# Altium PCB EM2_PCB.PcbDoc
Units mm, origin at the board's own origin, x right, y up, seen from the top; angles counter-clockwise.
Board outline 42 x 40 mm, 4 copper layers (Top Layer, Layer 1, Layer 2, Bottom Layer), stack 0.568 mm thick; 81 components, 71 nets, 313 pads, 15 vias.
Unrouted connection lines stored in the file: 167.
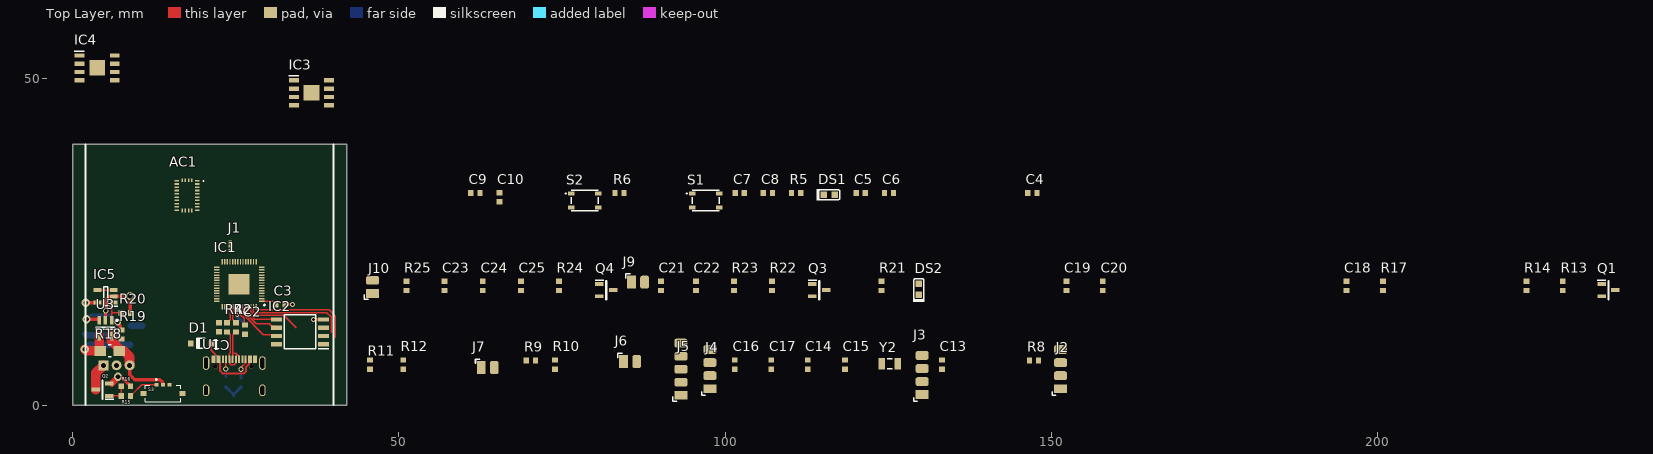
[diagram p0: Top Layer view]
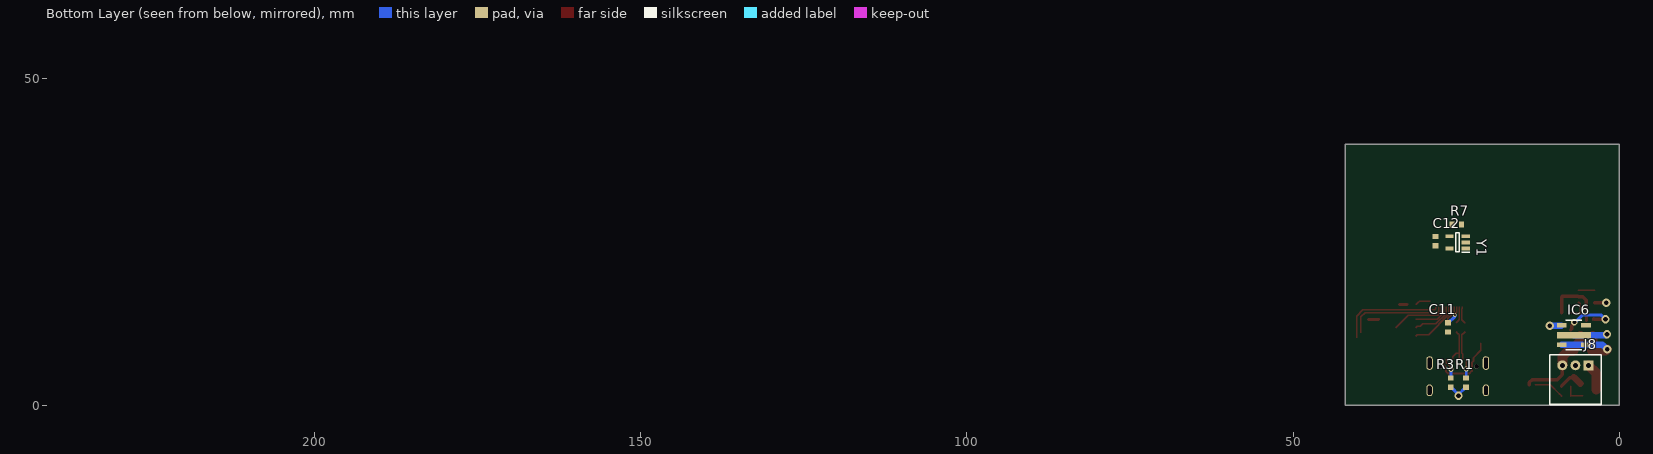
[diagram p1: Bottom Layer view, seen from below]
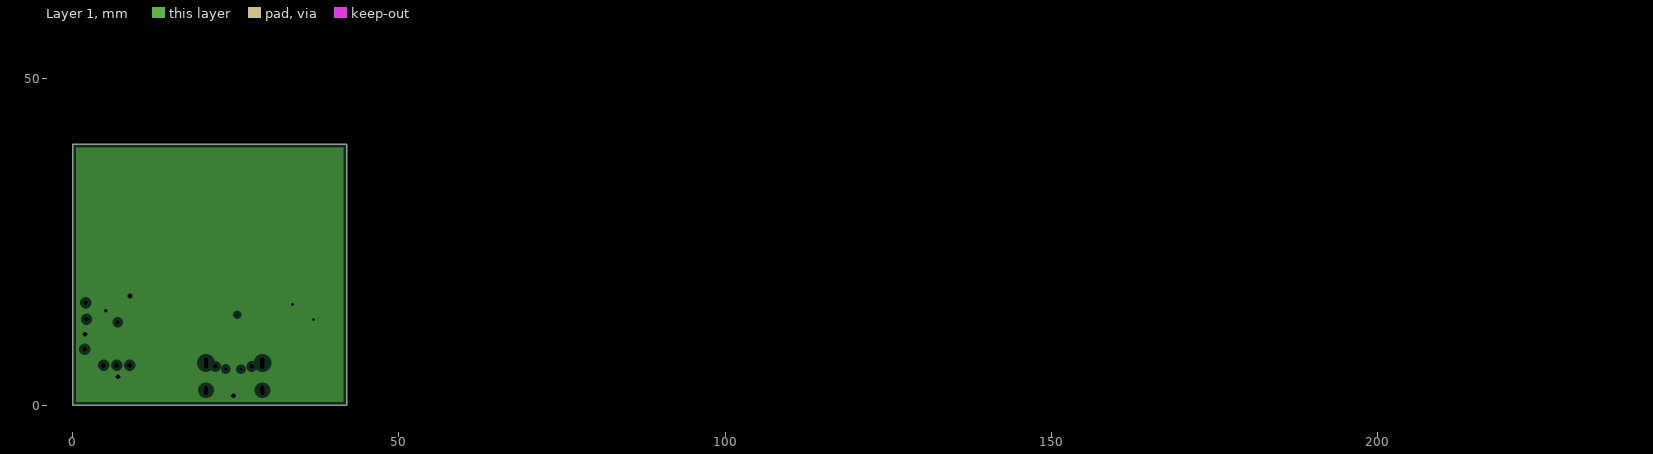
[diagram p2: Layer 1, clearances drawn from the general rule]
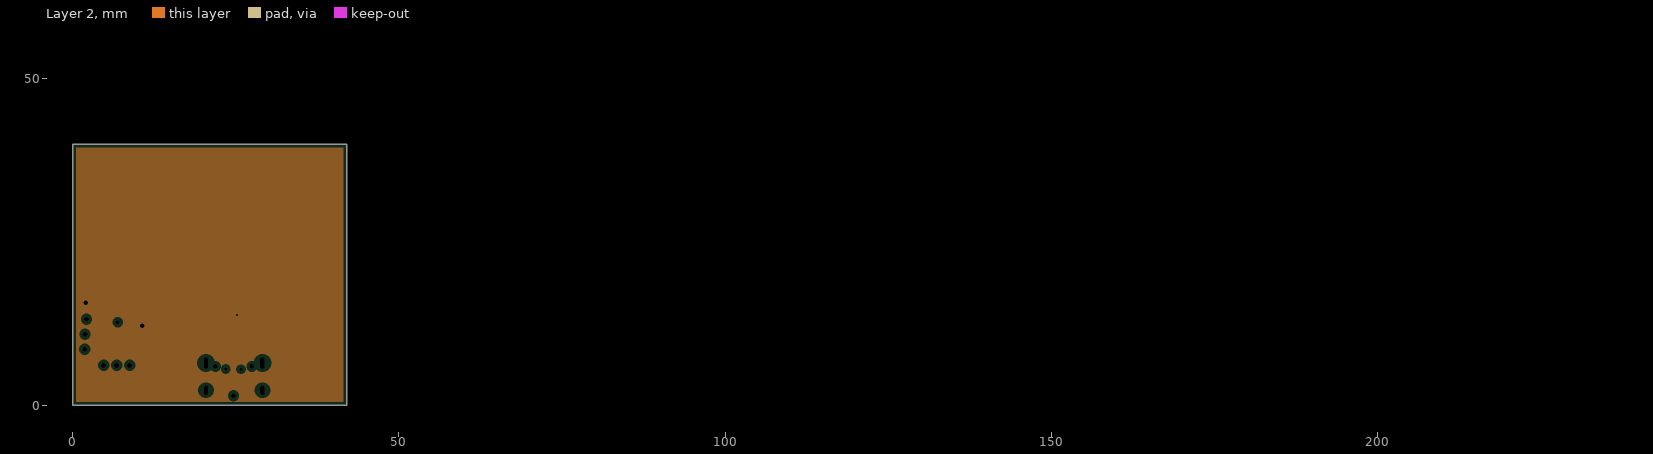
[diagram p3: Layer 2, clearances drawn from the general rule]

## Layer stack, top to bottom
Top Solder: solder mask 0.0102, Solder Resist, Dk 3.5
Top Layer: signal copper 0.0356
Dielectric 2: prepreg 0.0711, PP-006, Dk 4.1
Layer 1: plane copper 0.0175, net GND
Dielectric 1: dielectric 0.32, FR-4, Dk 4.8
Layer 2: plane copper 0.0175, net +3V3
Dielectric 3: prepreg 0.0711, PP-006, Dk 4.1
Bottom Layer: signal copper 0.0356
Bottom Solder: solder mask 0.0102, Solder Resist, Dk 3.5

## Board outline
0,0 42,0 42,40 0,40

## Design rules (kind name [scope] priority, off if disabled: settings)
AssemblyTestPointUsage [All] p1 off:
AssemblyTestpoint [All] p1 off: testpointundercomponent=TRUE minsize=1.016 maxsize=2.54 preferedsize=1.524 minholesize=0 maxholesize=1.016 preferedholesize=0.813 testpointgrid=0.025 usegrid=TRUE gridtolerance=0 allowsidetop=TRUE allowsidebottom=TRUE
Clearance RP2040 [HasFootprint('QFN40P700X700X90-57N-D')] p1: gap=0.05 ignorepadtopadclearanceinfootprint=FALSE
Clearance [All] p2: gap=0.15 ignorepadtopadclearanceinfootprint=FALSE except(0: Arc-Arc Arc-Track Arc-SMDPad Arc-THPad Arc-Via Arc-Hole Track-Track Track-SMDPad Track-THPad Track-Via Track-Hole)
DiffPairsRouting [(InNet('USB_D_N') OR InNet('USB_D_P'))] p1: maxlimit=0.254 minlimit=0.15 mostfreqgap=0.15 toplayer_minwidth=0.22 toplayer_maxwidth=0.22 toplayer_prefwidth=0.22 bottomlayer_minwidth=0.22 bottomlayer_maxwidth=0.22 bottomlayer_prefwidth=0.22 maxuncoupledlength=12.7
FabricationTestPointUsage [All] p1 off: valid=0 allowmultiple=FALSE
FabricationTestpoint [All] p1 off: side=3 testpointundercomponent=TRUE minsize=1.016 maxsize=2.54 preferedsize=1.524 minholesize=0 maxholesize=1.016 preferedholesize=0.813 testpointgrid=0.025 allowsidetop=TRUE allowsidebottom=TRUE usegrid=TRUE gridtolerance=0
PlaneClearance [All] p1: clearance=0.508
PlaneConnect [All] p1: planeconnectstyle=Relief reliefexpansion=0.508 reliefentries=4 reliefconductorwidth=0.254 reliefairgap=0.254
PolygonConnect [All] p1: connectstyle=Relief reliefconductorwidth=0.254 reliefentries=4 polygonreliefangle="90 Angle" airgapwidth=0.254
RoomDefinition Power_Nichrome [InComponentClass('Power_Nichrome')] p1 off: confinementstyle=ConfineIn formatcopy=TRUE lockcomponents=FALSE outline 44.831,11.557 247.777,11.557 247.777,22.225 44.831,22.225
RoomDefinition IMU_Motor [InComponentClass('IMU_Motor')] p2 off: confinementstyle=ConfineIn formatcopy=TRUE lockcomponents=FALSE outline 44.514,0.546 153.352,0.546 153.352,10.706 44.514,10.706
RoomDefinition RP2040_Conn [InComponentClass('RP2040_Conn')] p3 off: confinementstyle=ConfineIn formatcopy=TRUE lockcomponents=FALSE outline 44.831,23.368 173.99,23.368 173.99,35.814 44.831,35.814
RoutingVias Via_Small [All] p1: holewidth=0.3 width=0.6 viastyle="Through Hole" minholewidth=0.3 minwidth=0.6 maxholewidth=0.3 maxwidth=0.6
RoutingVias [All] p2 off: holewidth=0.711 width=1.27 viastyle="Through Hole" minholewidth=0.711 minwidth=1.27 maxholewidth=0.711 maxwidth=1.27
SolderMaskExpansion [All] p1: expansion=0.102 istentingtop=FALSE
Width Width_Power [(InNet('+7V4') OR InNet('+3V3') OR InNet('GND') OR InNet('GND_A') OR InNet('BAT_IN'))] p1: maxlimit=2 minlimit=0.2 preferedwidth=0.5
Width [All] p2: maxlimit=0.8 minlimit=0.2 preferedwidth=0.254
23 further rules are at their usual default settings.

## Classes and differential pairs
component class RP2040_Conn: C1 C2 C3 C4 C5 C6 C7 C8 C9 C10 C11 C12 DS1 IC1 IC2 J1 R1 R2 R3 R4 R5 R6 R7 S1 S2 U1 Y1
component class Power_Nichrome: C18 C19 C20 C21 C22 C23 C24 C25 D1 DS2 IC5 IC6 J8 J9 J10 Q1 Q2 Q3 Q4 R13 R14 R15 R16 R17 R18 R19 R20 R21 R22 R23 R24 R25 S3 U2 U3
component class IMU_Motor: AC1 C13 C14 C15 C16 C17 IC3 IC4 J2 J3 J4 J5 J6 J7 R8 R9 R10 R11 R12 Y2
differential pair USB_D: +USB_D_P -USB_D_N

## Components (designator, comment, footprint, x,y, rotation, side; value= is the part's Value field where it differs from the comment)
AC1 "BNO085" BNO085 17.536,32.151 r0 top
C1 "Capacitor" 1608[0603] 22.428,11.951 r90 top value=0.1u
C2 "Capacitor" 1608[0603] 26.429,11.582 r90 top value=0.1u
C3 "Capacitor" 1608[0603] 31.852,15.43 r180 top value=2.2u
C4 "Capacitor" 1608[0603] 147.066,32.512 r0 top value=2.2u
C5 "Capacitor" 1608[0603] 120.777,32.512 r0 top value=0.1u
C6 "Capacitor" 1608[0603] 125.095,32.512 r0 top value=0.1u
C7 "Capacitor" 1608[0603] 102.235,32.512 r0 top value=0.1u
C8 "Capacitor" 1608[0603] 106.553,32.512 r0 top value=0.1u
C9 "Capacitor" 1608[0603] 61.722,32.512 r0 top value=0.1u
C10 "Capacitor" 1608[0603] 65.405,31.877 r90 top value=0.1u
C11 "Capacitor" 1608[0603] 26.264,11.938 r90 bottom value=0.1u
C12 "Capacitor" 1608[0603] 28.218,25.146 r270 bottom value=0.1u
C13 "Capacitor" 1608[0603] 133.223,6.223 r90 top value=0.1u
C14 "Capacitor" 1608[0603] 112.649,6.223 r90 top value=0.1u
C15 "Capacitor" 1608[0603] 118.364,6.223 r90 top value=0.1u
C16 "Capacitor" 1608[0603] 101.473,6.223 r90 top value=22p
C17 "Capacitor" 1608[0603] 107.061,6.223 r90 top value=22p
C18 "Capacitor" 1608[0603] 195.199,18.288 r90 top value=0.01u
C19 "Capacitor" 1608[0603] 152.273,18.288 r90 top value=22u
C20 "Capacitor" 1608[0603] 157.861,18.288 r90 top value=22u
C21 "Capacitor" 1608[0603] 90.17,18.288 r90 top value=100u
C22 "Capacitor" 1608[0603] 95.504,18.288 r90 top value=100u
C23 "Capacitor" 1608[0603] 57.023,18.288 r90 top value=100u
C24 "Capacitor" 1608[0603] 62.865,18.288 r90 top value=100u
C25 "Capacitor" 1608[0603] 68.707,18.288 r90 top value=100u
D1 "1N4148W-7-F" DIOD-SOD123-2_V 19.698,9.474 r180 top
DS1 "KP-1608MGC" KING-0603LED_GREEN_V 115.951,32.258 r0 top
DS2 "KP-1608MGC" KING-0603LED_GREEN_V 129.667,17.78 r90 top
IC1 "RP2040" QFN40P700X700X90-57N-D 25.53,18.545 r180 top
IC2 "W25Q128JVSIQ" SOIC127P790X216-8N 34.841,11.245 r180 top
IC3 "TB67H450FNG,EL" SOIC127P600X175-9N 36.621,47.879 r0 top
IC4 "TB67H450FNG,EL" SOIC127P600X175-9N 3.759,51.689 r0 top
IC5 "S-89431ACMC-HBVT2U" SOT95P275X130-5N 5.08,16.688 r180 top
IC6 "NJM2884-U1-33" NJM2884-U1-33 22.619,9.868 r90 bottom
J1 "Debug" PinHeader_0.65_3_Half 24.154,23.749 r90 top
J2 "GNSS" PinHeader_2.0_4_SMD 151.384,2.54 r90 top
J3 "MOE_A" PinHeader_2.0_4_SMD 130.175,1.627 r90 top
J4 "MOE_B" PinHeader_2.0_4_SMD 97.663,2.54 r90 top
J5 "ToF" PinHeader_2.0_5_SMD 93.218,1.524 r90 top
J6 "Motor1" PinHeader_2.0_2_SMD 84.442,6.693 r0 top
J7 "Motor2" PinHeader_2.0_2_SMD 62.624,5.779 r0 top
J8 "JST_PH_3_SideEntry" JST_PH_3_SideEntry 2.806,7.727 r0 bottom
J9 "NichromeA" PinHeader_2.0_2_SMD 85.661,18.86 r0 top
J10 "NichromeB" PinHeader_2.0_2_SMD 45.974,17.145 r90 top
Q1 "IRFML8244TRPBF" SOT95P237X112-3N 235.331,17.653 r0 top
Q2 "IRFML8244TRPBF" SOT95P237X112-3N 4.61,2.388 r180 top
Q3 "IRFML8244TRPBF" SOT95P237X112-3N 114.427,17.653 r0 top
Q4 "IRFML8244TRPBF" SOT95P237X112-3N 81.788,17.653 r0 top
R1 "Resistor" 1608[0603] 23.495,3.467 r270 bottom value=5.1k
R2 "Resistor" 1608[0603] 25.043,11.938 r270 top value=27
R3 "Resistor" 1608[0603] 25.845,3.467 r270 bottom value=5.1k
R4 "Resistor" 1608[0603] 23.646,11.938 r270 top value=27
R5 "Resistor" 1608[0603] 110.871,32.512 r0 top value=1K
R6 "Resistor" 1608[0603] 83.82,32.512 r0 top value=1K
R7 "Resistor" 1608[0603] 24.916,27.686 r180 bottom value=1K
R8 "Resistor" 1608[0603] 147.32,6.858 r0 top value=10k
R9 "Resistor" 1608[0603] 70.231,6.858 r0 top value=R
R10 "Resistor" 1608[0603] 73.914,6.223 r90 top value=R
R11 "Resistor" 1608[0603] 45.593,6.223 r90 top value=R
R12 "Resistor" 1608[0603] 50.673,6.223 r90 top value=R
R13 "Resistor" 1608[0603] 228.346,18.288 r90 top value=3K
R14 "Resistor" 1608[0603] 222.758,18.288 r90 top value=10K
R15 "Resistor" 1608[0603] 8.179,1.41 r180 top value=10k
R16 "Resistor" 1608[0603] 8.179,2.908 r180 top value=10k
R17 "Resistor" 1608[0603] 200.787,18.288 r90 top value=1K
R18 "ERJ8CWFR010V" FP-ERJ8CW-MFG 5.715,8.344 r180 top
R19 "Resistor" 1608[0603] 7.518,10.846 r90 top value=50
R20 "Resistor" 1608[0603] 8.179,14.16 r0 top value=3K
R21 "Resistor" 1608[0603] 123.952,18.288 r90 top value=1K
R22 "Resistor" 1608[0603] 107.188,18.288 r90 top value=1k
R23 "Resistor" 1608[0603] 101.346,18.288 r90 top value=10k
R24 "Resistor" 1608[0603] 74.549,18.288 r90 top value=1k
R25 "Resistor" 1608[0603] 51.181,18.288 r90 top value=10k
S1 "SKRPACE010" SMT(4.2X3.2) 97.028,31.369 r0 top
S2 "SKRPACE010" SMT(4.2X3.2) 78.486,31.369 r0 top
S3 "SSAJ120100" SSAJ120100 13.856,1.803 r0 top
U1 "USB_C_5077CR-16SMC2-BK-TR" USB_C_5077CR-16SMC2-BK-TR 29.097,7.604 r180 top
U3 "LT6106HS5#TRMPBF" LT-S5-5-TSOT-23_N 5.042,11.811 r270 top
Y1 "SIT2001BI-S2-33E-12.000000D" SOT95P280X145-5N 24.809,24.953 r0 bottom
Y2 "FC-135" EPSON-FC-135_V 125.222,6.35 r0 top

## Footprints (in the part's own frame and the unit in brackets; to place one, negate y for a bottom-side part, rotate by r counter-clockwise, add the part's x,y. Pads: shape width x height; smd on the part's side, far side on the other; paste and mask are expansions set on the pad)
1608[0603] [mm] "Chip Capacitor, Body 1.6x0.8mm, IPC High Density"
  rect 0.8x0.9 smd: 1(-0.7,0) 2(0.7,0)
  body extent -0.87,-0.48 0.87,0.48, height 1.3
BNO085 [mm]
  rect 0.675x0.25 smd: 1(1.563,2.25) 6(-1.563,2.25) 7(-1.563,1.75) 8(-1.563,1.25) 9(-1.563,0.75) 10(-1.563,0.25) 11(-1.563,-0.25) 12(-1.563,-0.75) 13(-1.563,-1.25) 14(-1.563,-1.75) 15(-1.563,-2.25) 20(1.563,-2.25) 21(1.563,-1.75) 22(1.563,-1.25) 23(1.563,-0.75) 24(1.563,-0.25) 25(1.563,0.25) 26(1.563,0.75) 27(1.563,1.25) 28(1.563,1.75)
  rect 0.25x0.575 smd: 2(0.75,2.313) 3(0.25,2.313) 4(-0.25,2.313) 5(-0.75,2.313) 16(-0.75,-2.313) 17(-0.25,-2.313) 18(0.25,-2.313) 19(0.75,-2.313)
  silkscreen extent 2.5,2.15 2.6,2.25, body extent -1.9,-2.6 1.9,2.6, height 1.28
DIOD-SOD123-2_V [mm] "SOD123, 2-Leads, Body 2.7x1.55mm, Height 1.45mm"
  rect 0.9x0.95 smd: 1(-1.575,0) 2(1.575,0)
  silkscreen extent -0.64,-0.83 0.64,0.77, body extent -1.35,-0.77 1.35,0.77, height 1.45
EPSON-FC-135_V [mm] "SMD, 2-Leads, Body 3.2x1.5mm"
  rect 1x1.8 smd: 1(-1.25,0) 2(1.25,0)
  silkscreen extent -0.35,-0.75 0.35,0.75, body extent -1.6,-0.75 1.6,0.75, height 0.9
FP-ERJ8CW-MFG [mm]
  rect 1.75x1.55 smd paste+0 mask+0: 1(-1.475,0) 2(1.475,0)
  silkscreen extent -0.23,-0.9 0.23,0.9, body extent -2.45,-1 2.45,1, height 0.25
JST_PH_3_SideEntry [mil]
  rect 60x60 hole 30: 1(76.77,62.99)
  round 60 hole 30: 2(155.51,62.99) 3(234.25,62.99)
  silkscreen extent 0,0 311,299
KING-0603LED_GREEN_V [mm] "SMT LED, 2-Leads, Body 1.6x0.8mm (0603-Size)"
  rect 1x1 smd paste+0 mask+0: 1(0.85,0) 2(-0.85,0)
  silkscreen extent -1.97,-0.85 1.6,0.85, body extent -0.92,-0.53 1.09,0.53, height 1.1
LT-S5-5-TSOT-23_N [mm] "SOT23, 5-Leads, Body 2.90x1.63mm, Pitch 0.95mm, IPC Medium Density"
  rect 1.3x0.55 smd: 1(-1.2,0.95) 2(-1.2,0) 3(-1.2,-0.95) 4(1.2,-0.95) 5(1.2,0.95)
  silkscreen extent -1.32,-1.45 0.15,1.9, body extent -0.87,-1.45 0.87,1.45, height 1
NJM2884-U1-33 [mm]
  rect 0.7x1.5 smd: 1(-0.611,-17.471) 3(2.389,-17.471) 4(2.389,-13.771) 5(-0.611,-13.771)
  rect 1x5.207 smd: 2(0.889,-15.621)
  silkscreen extent -1.36,-18.56 3.14,-14.37, body extent -1.45,-17.87 3.05,-13.37, height 1.5
PinHeader_0.65_3_Half [mil]
  rect 18x20 smd: 1(0,0) 2(25.5,0) 3(51,0)
PinHeader_2.0_2_SMD [mm]
  rect 1.35x2 smd: 1(0,0)
  rrect50% 1.35x2 smd: 2(2,0)
  silkscreen extent -0.89,0.64 -0.25,1.27
PinHeader_2.0_4_SMD [mm]
  rect 1.35x2 smd: 1(0,0)
  rrect50% 1.35x2 smd: 2(2,0) 3(4,0) 4(6,0)
  silkscreen extent -1.02,0.76 -0.51,1.27
PinHeader_2.0_5_SMD [mm]
  rect 1.35x2 smd: 1(0,0)
  rrect50% 1.35x2 smd: 2(2,0) 3(4,0) 4(6,0) 5(8,0)
  silkscreen extent -0.89,0.63 -0.25,1.27
QFN40P700X700X90-57N-D [mm]
  rect 0.85x0.2 smd: 1(-3.45,2.6) 2(-3.45,2.2) 3(-3.45,1.8) 4(-3.45,1.4) 5(-3.45,1) 6(-3.45,0.6) 7(-3.45,0.2) 8(-3.45,-0.2) 9(-3.45,-0.6) 10(-3.45,-1) 11(-3.45,-1.4) 12(-3.45,-1.8) 13(-3.45,-2.2) 14(-3.45,-2.6) 29(3.45,-2.6) 30(3.45,-2.2) 31(3.45,-1.8) 32(3.45,-1.4) 33(3.45,-1) 34(3.45,-0.6) 35(3.45,-0.2) 36(3.45,0.2) 37(3.45,0.6) 38(3.45,1) 39(3.45,1.4) 40(3.45,1.8) 41(3.45,2.2) 42(3.45,2.6)
  rect 0.2x0.85 smd: 15(-2.6,-3.45) 16(-2.2,-3.45) 17(-1.8,-3.45) 18(-1.4,-3.45) 19(-1,-3.45) 20(-0.6,-3.45) 21(-0.2,-3.45) 22(0.2,-3.45) 23(0.6,-3.45) 24(1,-3.45) 25(1.4,-3.45) 26(1.8,-3.45) 27(2.2,-3.45) 28(2.6,-3.45) 43(2.6,3.45) 44(2.2,3.45) 45(1.8,3.45) 46(1.4,3.45) 47(1,3.45) 48(0.6,3.45) 49(0.2,3.45) 50(-0.2,3.45) 51(-0.6,3.45) 52(-1,3.45) 53(-1.4,3.45) 54(-1.8,3.45) 55(-2.2,3.45) 56(-2.6,3.45)
  rect 3.2x3.2 smd: 57(0,0)
  silkscreen extent -3.98,3.1 -3.78,3.3, body extent -3.55,-3.55 3.55,3.55, height 0.9
SMT(4.2X3.2) [mm]
  rect 1.05x0.65 smd: 1(-2.075,1.075) 2(2.075,1.075) 3(-2.075,-1.075) 4(2.075,-1.075)
  silkscreen extent -2.96,-1.6 2.1,1.6, body extent -2.3,-1.6 2.3,1.6, height 2.5
SOIC127P600X175-9N [mm]
  rect 1.525x0.65 smd: 1(-2.712,1.905) 2(-2.712,0.635) 3(-2.712,-0.635) 4(-2.712,-1.905) 5(2.712,-1.905) 6(2.712,-0.635) 7(2.712,0.635) 8(2.712,1.905)
  rect 2.39x2.39 smd: 9(0,0)
  silkscreen extent -3.47,2.58 -1.95,2.58, body extent -3,-2.45 3,2.45, height 1.75
SOIC127P790X216-8N [mm]
  rect 1.65x0.65 smd: 1(-3.6,1.905) 2(-3.6,0.635) 3(-3.6,-0.635) 4(-3.6,-1.905) 5(3.6,-1.905) 6(3.6,-0.635) 7(3.6,0.635) 8(3.6,1.905)
  silkscreen extent -4.43,-2.62 2.42,2.62, body extent -3.95,-2.62 3.95,2.62, height 2.16
SOT95P237X112-3N [mm]
  rect 1.3x0.6 smd: 1(-1.05,0.95) 2(-1.05,-0.95) 3(1.05,0)
  silkscreen extent -1.7,-1.46 0.05,1.5, body extent -1.18,-1.46 1.18,1.46, height 1.12
SOT95P275X130-5N [mm]
  rect 1.2x0.6 smd: 1(-1.25,0.95) 2(-1.25,0) 3(-1.25,-0.95) 4(1.25,-0.95) 5(1.25,0.95)
  silkscreen extent -1.85,-1.45 0.3,1.5, body extent -1.38,-1.45 1.38,1.45, height 1.3
SOT95P280X145-5N [mm]
  rect 1.25x0.6 smd: 1(-1.25,0.95) 2(-1.25,0) 3(-1.25,-0.95) 4(1.25,-0.95) 5(1.25,0.95)
  silkscreen extent -1.88,-1.45 0.28,1.5, body extent -1.4,-1.45 1.4,1.45, height 1.45
SSAJ120100 [mm]
  rect 0.6x0.51 smd: 1(-1,1.355) 2(1,1.355) C1(0,1.355)
  rect 0.9x0.7 smd: MP1(-3,0) MP2(3,0)
  silkscreen extent -2.75,-1.25 2.75,2.25
USB_C_5077CR-16SMC2-BK-TR [mm]
  rect 0.6x1.14 smd: 1(7.52,0.57) 2(6.72,0.57) 11(1.92,0.57) 12(1.12,0.57)
  rect 0.3x1.14 smd: 3(6.07,0.57) 4(5.57,0.57) 5(5.07,0.57) 6(4.562,0.57) 7(4.07,0.57) 8(3.57,0.57) 9(3.07,0.57) 10(2.57,0.57)
  oval 1x1.8 hole 0.6 slot 1.4 at 90 deg: ""(0,5.32) ""(8.64,5.32)
  oval 1x2.1 hole 0.6 slot 1.7 at 90 deg: ""(0,1.14) ""(8.64,1.14)
  round 0.65 hole 0.65: ""(1.64,1.64) ""(7.21,1.64)

## Part data
AC1: "Accelerometer", Manufacturer_Name="Hillcrest Laboratories", Datasheet Link=https://www.hillcrestlabs.com/downloads/bno080-datasheet, Height=1.18mm, Manufacturer_Part_Number=BNO085
D1: library part CMP-2000-04932-2, "Fast Switching Diode, 100 V, 0.15 A, -65 to 150 degC, 2-Pin?SOD123, RoHS, Tape and Reel", If - Forward Current=0.15A, Ir - Reverse Current=1uA, Manufacturer=DiodesIncorporated, Max Surge Current=2A, Maximum Operating Temperature=+150C, Minimum Operating Temperature=-65C, Operating Temperature Range=-65Cto+150C, Package / Case=SOD-123, Package Reference=SOD123-2, Peak Reverse Voltage=100V, Vf - Forward Voltage=1.25V, Brand=DiodesIncorporated, Configuration=Single, Datasheet URL=http://www.farnell.com/datasheets/1915529.pdf, Datasheet Version="Rev. 24-2, 10/2013", Factory Pack Quantity=3000, Height=1.25mm, Length=2.85mm, Manufacturer URL=http://www.diodes.com/, Mounting Style=SMD/SMT, Package URL=http://www.diodes.com/datasheets/ds18004.pdf, Packaging=Reel, Product=SwitchingDiodes, Product Category=Diodes-GeneralPurpose,Power,Switching, Recovery Time=4ns, RoHS=True, Series=1N4148, Type=SwitchingDiode, Unit Weight=0.000353oz, Width=1.7mm
DS1 DS2: library part CMP-0404-00001-1, "LED, SMT, 0603(1608), 1.1mm thickness, Green", Forward Current="30 mA", Manufacturer=Kingbright, Power Dissipation="75 mW", Reverse Voltage="5 V", Storage Temperature="-40 to +85 degC", ComponentLink1Description="Manufacturer URL", ComponentLink1URL=http://www.kingbright.com/, Mounting Technology="Surface Mount", PackageDescription="2-Pin SMT LED, 1.6 x 0.8 mm Pitch", PackageReference=0603LED_GREEN, Packing Type="2000 pcs / reel", PartNumber=KP-1608MGC
IC1: "Integrated Circuit", Manufacturer_Name=RASPBERRY-PI, Datasheet Link=https://datasheets.raspberrypi.org/rp2040/rp2040-datasheet.pdf, Height=0.9mm, Manufacturer_Part_Number=RP2040
IC2: "Integrated Circuit", Manufacturer_Name=Winbond, Mouser Part Number=454-W25Q128JVSIQ, Arrow Part Number=W25Q128JVSIQ, Arrow Price/Stock=https://www.arrow.com/en/products/w25q128jvsiq/winbond-electronics?region=nac, Datasheet Link=https://www.winbond.com/hq/search-resource-file.jsp?partNo=W25Q128JVSIQ&type=datasheet, Height=2.16mm, Manufacturer_Part_Number=W25Q128JVSIQ, Mouser Price/Stock=https://www.mouser.co.uk/ProductDetail/Winbond/W25Q128JVSIQ?qs=qSfuJ%252Bfl%2Fd6tLXvPR4fl9w%3D%3D
IC3 IC4: "Integrated Circuit", Manufacturer_Name=Toshiba, Mouser Part Number=757-TB67H450FNGEL, Arrow Part Number=TB67H450FNG,EL, Arrow Price/Stock=https://www.arrow.com/en/products/tb67h450fngel/toshiba?region=nac, Datasheet Link=http://toshiba.semicon-storage.com/info/docget.jsp?did=65346&prodName=TB67H450FNG, Height=1.75mm, Manufacturer_Part_Number=TB67H450FNG,EL, Mouser Price/Stock=https://www.mouser.co.uk/ProductDetail/Toshiba/TB67H450FNGEL?qs=h6V4JsTaLXeReNg2bp0jug%3D%3D
IC5: "Integrated Circuit", Manufacturer_Name="ABLIC Inc.", Mouser Part Number=628-S89431ACMCHBVT2G, Datasheet Link=https://datasheet.datasheetarchive.com/originals/distributors/DKDS-7/134209.pdf, Height=1.3mm, Manufacturer_Part_Number=S-89431ACMC-HBVT2U, Mouser Price/Stock=https://www.mouser.co.uk/ProductDetail/ABLIC/S-89431ACMC-HBVT2U/?qs=sE1HjTVAc2jFUPQ1oZ8CUg%3D%3D
J1: library part PinHeader_0.65_3_Half
J2 J3 J4: library part PinHeader_2.0_4_SMD
J5: library part PinHeader_2.0_5_SMD
J6 J7 J9 J10: library part PinHeader_2.0_2_SMD
Q1 Q2 Q3 Q4: "Transistor", Manufacturer_Name=Infineon, Mouser Part Number=942-IRFML8244TRPBF, Arrow Part Number=IRFML8244TRPBF, Arrow Price/Stock=https://www.arrow.com/en/products/irfml8244trpbf/infineon-technologies-ag, Datasheet Link=http://www.infineon.com/dgdl/irfml8244pbf.pdf?fileId=5546d462533600a40153562817c91fc0, Height=1.12mm, Manufacturer_Part_Number=IRFML8244TRPBF, Mouser Price/Stock=https://www.mouser.co.uk/ProductDetail/Infineon-IR/IRFML8244TRPBF?qs=9%252BKlkBgLFf0%252B01xOpCf7sA%3D%3D
R18: library part CMP-2003-00786-2, "RES 0.01 OHM 1% 1W 1206", Case Code (Imperial)=1206, Case Code (Metric)=3216, Max Operating Temperature=125°C, Max Power Dissipation=1W, Min Operating Temperature=-55°C, Resistance=10mR, Resistor Type="Thick Film", Temperature Coefficient=75ppm/°C, Tolerance=1%, Case/Package=1206, Depth=1.6mm, Features="Automotive AEC-Q200", Height=0.03inch, Lead Free="Lead Free", Length=3.2mm, Military Standard=Not, Mount="Surface Mount", Number of Terminations=2, Packaging="Cut Tape", Power Rating=1W, REACH SVHC="No SVHC", Termination=Flat, Width=0.063inch
S1 S2: "Switch", Manufacturer_Name="ALPS Electric", Mouser Part Number=688-SKRPACE010, Arrow Part Number=SKRPACE010, Arrow Price/Stock=https://www.arrow.com/en/products/skrpace010/alps-electric, Datasheet Link=http://www.alps.com/prod/info/E/HTML/Tact/SurfaceMount/SKRP/SKRPACE010.html, Manufacturer_Part_Number=SKRPACE010, Mouser Price/Stock=https://www.mouser.co.uk/ProductDetail/Alps-Alpine/SKRPACE010?qs=dHDuPHwQO79W8iY66hDbLQ%3D%3D
S3: "Switch", Manufacturer_Name="ALPS Electric", Mouser Part Number=688-SSAJ120100, Datasheet Link=https://www.mouser.jp/datasheet/2/15/SSAJ-1370983.pdf, Height=0.7mm, Manufacturer_Part_Number=SSAJ120100, Mouser Price/Stock=https://www.mouser.co.uk/ProductDetail/Alps-Alpine/SSAJ120100?qs=35GPJvxY%252Bl5mRNwFoBrl2g%3D%3D
U3: library part CMP-0359-01868-2, "Single Channel, Low Cost, High Side Current Sense Operational Amplifier, 0.2 MHz Typical GBW, 5-Pin SOT-23 (S5-5), High Temperature / Automotive, Pb-Free, Mini Reel", Linear Technology Part Number=LT6106, Manufacturer="Linear Technology", Channels (#)=1, Code_JEDEC=MO-193, ComponentLink1Description="Manufacturer URL", ComponentLink1URL=http://www.linear.com/, ComponentLink2Description=Datasheet, ComponentLink2URL=http://cds.linear.com/docs/en/datasheet/6106fa.pdf, ComponentLink3Description="Package Specification", ComponentLink3URL=http://cds.linear.com/docs/en/packaging/SOT_5_05-08-1635.pdf, DatasheetVersion="Rev. A", GBW (MHz) Typical=0.2, Is (mA) Typical=0.06, Mounting Technology="Surface Mount", PackageDescription="5-Lead Plastic TSOT-23, Body 1.63 x 2.90 mm, Pitch 0.95 mm", PackageReference=LT-S5-5-TSOT-23, Packing="Mini Reel", PartNumber=LT6106HS5#TRMPBF, RevisionNote="URLs updated", RoHS=Pb-Free, Type=CSA, Vos (mV) Guaranteed=0.25, Vos (mV) Typical=0.15, Vs Max (V)=36, Vs Min (V)=2.7
Y1: "Crystal or Oscillator", Manufacturer_Name=SiTime, Datasheet Link=https://www.sitime.com/datasheet/SiT2001, Height=1.45mm, Manufacturer_Part_Number=SIT2001BI-S2-33E-12.000000D
Y2: library part CMP-2100-03637-1, "Crystal Unit, 32 to 77.5 KHz, 0.5 uW, -40 to 85 degC, 2-Pin SMD, RoHS", Manufacturer=Epson, Package Description="2-Pin Surface Mount Device, Body 3.2 x 1.5 mm", Datasheet URL=http://www5.epsondevice.com/en/products/khz_range/fc135r.html#, Datasheet Version=42036.0, Manufacturer URL=https://www.eea.epson.com/, Package Reference=FC-135, RoHSCompliant=false
C1 C2 C3 C4 C5 C6 C7 C8 C9 C10 C11 C12 C13 C14 C15 C16 C17 C18 C19 C20 C21 C22 C23 C24 C25: SimulationGenericComponent=True
R1 R2 R3 R4 R5 R6 R7 R8 R9 R10 R11 R12 R13 R14 R15 R16 R17 R19 R20 R21 R22 R23 R24 R25: SimulationGenericComponent=True, TC1=0, TC2=0

## Via types
v1: diameter 1.27, hole 0.711, Top Layer to Bottom Layer, 3 vias
v2: diameter 0.8, hole 0.5, Top Layer to Layer 1, 3 vias
v3: diameter 1.27, hole 0.711, Top Layer to Layer 1, 2 vias
v4: diameter 1.27, hole 0.711, Layer 1 to Bottom Layer, 2 vias
v5: diameter 0.8, hole 0.5, Top Layer to Bottom Layer, 2 vias
v6: diameter 1.27, hole 0.711, Layer 2 to Bottom Layer, 1 vias
v7: diameter 1, hole 0.6, Top Layer to Bottom Layer, 1 vias
v8: diameter 0.6, hole 0.3, Top Layer to Bottom Layer, 1 vias

## Nets (pads, with @x,y where several pads share a name; then routed paths per layer and width w, separated by ;. In a path a pad name is that pad's centre, name@x,y a point inside that pad or via, vN(x,y) a via of type N, cw(c..) or ccw(c..) an arc to the next point about the centre after c; other vN are vias at no path point)
+1V1: C2.2 C4.2 C10.1 IC1.23 IC1.45 IC1.50 | length 3.1
  Top Layer w0.2: IC1.50 25.73,13.844 26.276,13.297 26.276,12.435 C2.2
+3V3: AC1.3 AC1.28 C1.2 C3.2 C5.2 C6.1 C7.1 C8.1 C9.1 C11.2 C12.1 C14.2 C15.2 C20.2 C21.2 C22.2 IC1.1 IC1.10 IC1.22 IC1.33 IC1.42 IC1.43 IC1.44 IC1.48 IC1.49 IC2.8 IC3.4 IC4.4 IC5.5 IC6.4 J2.1 J3.1 J4.1 J5.4 Q1.1 R7.1 R8.1 R21.1 Y1.4 | length 10.3
  Top Layer w0.2: IC1.48 24.93,14.257 v8@25.235,13.951 ; v8(25.235,13.843) v8@25.235,13.951 ; IC1.49 25.33,14.046 v8@25.235,13.951 ; IC1.1 30.637,15.945 30.802,15.78 30.852,15.78 31.152,15.48 C3.2
  Top Layer w0.5: v1(2.045,15.71) 2.059,15.724 3.816,15.724 IC5.5
  Bottom Layer w0.5: IC6.4 IC6.4@8.886,12.218 ; v6@10.655,12.218 v6(10.693,12.179) ; v8(25.235,13.843) 25.254,13.824 25.254,13.598 26.214,12.638 C11.2
  Bottom Layer w1: IC6.4@8.886,12.218 v6@10.655,12.218
+7V4: C19.2 C23.2 C24.2 C25.2 D1.2 IC3.5 IC4.5 IC6.1 IC6.5 J9.2 J10.2 R13.2 R18.2 U3.4 | length 12
  Top Layer w0.5: R18.2@4.092,8.492 4.215,8.369 R18.2
  Top Layer w1.5: v1(1.88,8.598) 2.109,8.369 R18.2@4.215,8.369 ; R18.2@4.092,8.492 U3.4
  Bottom Layer w1: v1(1.88,8.598) 1.953,8.598 2.612,9.257 IC6.5
BAT_IN: J8.3 R18.1 R19.1 S3.C1 U3.5 | length 13.4
  Top Layer w0.5: J8.3 8.756,4.706 9.538,3.924 13.386,3.924 13.806,3.504 13.806,3.163 13.811,3.158 S3.C1
  Top Layer w1.5: U3.5 5.992,9.86 7.065,8.787 7.065,8.369 7.09,8.344 R18.1 7.215,8.319 7.873,8.319 8.752,7.44 8.752,6.132 J8.3
GND: AC1.2 AC1.10 AC1.25 C1.1 C2.1 C3.1 C4.1 C5.1 C6.2 C7.2 C8.2 C9.2 C10.2 C11.1 C12.2 C13.1 C14.1 C15.1 C16.1 C17.1 C18.2 C19.1 C20.1 C21.1 C22.1 C23.1 C24.1 C25.1 DS1.2 DS2.2 IC1.19 IC1.57 IC2.4 IC3.1 IC4.1 IC5.2 IC6.2 J1.2 J2.4 J3.4 J4.4 J5.5 Q2.2 R1.2 R3.2 R9.1 R10.1 R11.1 R12.1 R16.1 R17.1 R20.2 S1.3 S1.4 S2.1 S2.2 U1.1 U1.12 U3.2 Y1.1 | length 25.3
  Top Layer w0.5: U3.2 5.061,13.03 5.061,14.472 v2(5.08,14.491) 5.08,16.091 5.397,16.408 5.401,16.408 5.63,16.638 6.28,16.638 6.355,16.713 8.776,16.713 v3(8.801,16.739) ; Q2.2 Q2.2@6.01,3.338 ; v3@6.972,4.3 v3(6.972,4.381) 7.12,4.234 7.603,4.234 8.879,2.958 R16.1 ; v3@8.75,16.688 8.84,16.598 8.84,14.199 R20.2 ; C3.1 v2(33.706,15.43) ; v2(36.906,13.144) 36.909,13.147 38.438,13.147 IC2.4
  Top Layer w1: Q2.2@6.01,3.338 v3@6.972,4.3
  Bottom Layer w0.5: R1.2 23.545,2.767 24.663,1.649 v4@24.663,1.636 ; v4(24.663,1.473) v4@24.663,1.636 ; R3.2 25.794,2.767 v4@24.663,1.636
  Bottom Layer w1: v4(1.918,10.884) 1.991,10.884 2.118,10.757 IC6.2
GND_A: J8.1 Q2.3 | length 4.2
  Top Layer w1.5: Q2.3 3.56,4.931 J8.1
GPIO2_LED: IC1.4 R5.1
GPIO3_ToF_RST: IC1.5 J5.2
GPIO4_GNSS_TX: IC1.6 J2.2
GPIO5_GNSS_RX: IC1.7 J2.3
GPIO6_ToF_SDA: IC1.8 J5.3
GPIO7_ToF_SCL: IC1.9 J5.1
GPIO10_MO_A1: IC1.13 IC3.3
GPIO11_MO_A2: IC1.14 IC3.2
GPIO12_IMU_MISO: AC1.20 IC1.15
GPIO13_IMU_CS: AC1.18 IC1.16
GPIO14_IMU_SCK: AC1.19 IC1.17
GPIO15_IMU_MOSI: AC1.17 IC1.18
GPIO16_IMU_INT: AC1.14 IC1.27
GPIO17_IMU_RST: AC1.11 IC1.28
GPIO18_MO_B1: IC1.29 IC4.3
GPIO19_MO_B2: IC1.30 IC4.2
GPIO20_MOE_A1: IC1.31 J3.2
GPIO21_MOE_B1: IC1.32 J4.2
GPIO22_MOE_A2: IC1.34 J3.3
GPIO23_MOE_B2: IC1.35 J4.3
GPIO24_NichromeA: IC1.36 R22.1
GPIO25_NichromeB: IC1.37 R24.1
GPIO26_Imonitor: IC1.38 IC5.3 IC5.4 | length 2.5
  Top Layer w0.254: IC5.4 IC5.3
GPIO29_Vmonitor: IC1.41 R14.2
M1_MINUS: IC3.6 J6.2
M1_PLUS: IC3.8 J6.1
M2_MINUS: IC4.6 J7.2
M2_PLUS: IC4.8 J7.1
NetAC1_4: AC1.4 AC1.5 AC1.6 R8.2
NetAC1_9: AC1.9 C13.2
NetAC1_26: AC1.26 C16.2 Y2.1
NetAC1_27: AC1.27 C17.2 Y2.2
NetC18_1: C18.1 Q1.3 R13.1 R17.2
NetDS1_1: DS1.1 R5.2
NetDS2_1: DS2.1 R21.2
NetIC1_46: IC1.46 R4.1 | length 2.7
  Top Layer w0.2: R4.1 23.696,12.638 23.996,12.938 24.134,13.076 24.134,14.766 24.13,14.77 IC1.46@24.13,15.091
NetIC1_47: IC1.47 R2.1 | length 2.7
  Top Layer w0.2: IC1.47 24.53,13.151 24.693,12.988 24.693,12.938 24.993,12.638 R2.1
NetIC3_7: IC3.7 R9.2 R10.2
NetIC4_7: IC4.7 R11.2 R12.2
NetIC5_1: IC5.1 R20.1 U3.1 | length 4.5
  Top Layer w0.254: U3.1 5.992,14.288 ; IC5.1 6.165,15.738 5.992,15.565 5.992,14.288 ; R20.1 6.119,14.161 5.992,14.288
NetJ9_1: J9.1 Q3.3
NetJ10_1: J10.1 Q4.3
NetQ1_2: Q1.2 R14.1
NetQ2_1: Q2.1 R15.2 R16.2 | length 3.3
  Top Layer w0.254: Q2.1 R15.2@7.451,1.438 ; R15.2 R16.2
NetQ3_1: Q3.1 R22.2 R23.1
NetQ4_1: Q4.1 R24.2 R25.1
NetR1_1: R1.1 U1.4 | length 2.8
  Top Layer w0.254: v5(23.482,5.575) 23.504,5.597 23.504,7.012 U1.4
  Bottom Layer w0.254: R1.1@23.482,4.446 R1.1@23.647,4.281
  Bottom Layer w0.4: R1.1@23.482,4.446 v5(23.482,5.575)
NetR3_1: R3.1 U1.10 | length 3.2
  Top Layer w0.254: v5(25.832,5.524) 25.936,5.629 25.936,5.915 26.504,6.482 26.504,7.011 U1.10
  Bottom Layer w0.254: R3.1@25.832,4.18 R3.1
  Bottom Layer w0.5: R3.1@25.832,4.18 v5(25.832,5.524)
NetR6_1: R6.1 S2.3 S2.4
NetR7_2: R7.2 Y1.3
NetR15_1: R15.1 S3.1 | length 4.7
  Top Layer w0.254: R15.1 8.879,1.46 9.152,1.733 9.202,1.733 10.628,3.158 S3.1
NetR19_2: R19.2 U3.3 | length 9.1
  Top Layer w0.254: U3.3@3.944,13.246 4.092,13.098 U3.3
  Top Layer w0.5: v1(2.134,13.17) 3.868,13.17 U3.3@3.944,13.246 ; v7(6.917,12.725) 6.917,12.59 7.318,12.189 7.318,11.696 7.468,11.546 R19.2
  Bottom Layer w0.5: v1(2.134,13.17) 2.164,13.17 2.811,13.818 5.689,13.818 6.782,12.725 v7(6.917,12.725)
QSPI_SCLK: IC1.52 IC2.6 | length 6.6
  Top Layer w0.2: IC1.52 26.53,14.06 28.118,12.471 30.137,12.471 30.504,12.105 31.016,12.105 IC2.6
QSPI_SD0: IC1.53 IC2.5 | length 5.7
  Top Layer w0.2: IC1.53 26.93,14.18 27.96,13.15 IC2.5
QSPI_SD1: IC1.55 IC2.2 | length 15.4
  Top Layer w0.2: IC1.55 27.73,14.384 27.902,14.211 38.964,14.211 39.637,13.538 39.637,11.087
QSPI_SD2: IC1.54 IC2.3 | length 8.8
  Top Layer w0.2: IC1.54 27.33,14.314 27.813,13.83 32.347,13.83 34.297,11.88
QSPI_SD3: IC1.51 IC2.7 | length 7.6
  Top Layer w0.2: IC1.51 26.13,13.964 29.259,10.835 31.016,10.835 IC2.7
QSPI_SS: IC1.56 IC2.1 R6.2 | length 16.3
  Top Layer w0.2: IC1.56@28.13,14.77 IC1.56 ; IC1.56@28.13,14.77 28.283,14.618 39.345,14.618 40.284,13.678 40.284,10.338
RUN: IC1.26 S1.1 S1.2
SWCLK: IC1.24 J1.3
SWDIO: IC1.25 J1.1
USB_D_N: R4.2 U1.5 U1.7 | length 6.9
  Top Layer w0.22: R4.2 23.936,10.948 24.03,10.948 24.159,10.819 24.159,9.804 24.159,8.001 24.027,7.868 U1.5 24.067,6.994 24.067,6.437 24.281,6.223 24.789,6.223 24.987,6.421 24.987,6.994 U1.7
USB_D_P: R2.2 U1.6 U1.8 | length 6.1
  Top Layer w0.22: U1.6 24.535,7.996 24.529,8.001 ; R2.2 24.753,10.948 24.658,10.948 24.529,10.819 24.529,9.651 24.529,8.001 ; U1.8 25.527,7.454 24.98,8.001 24.529,8.001
VBUS: D1.1 U1.2 U1.11 | length 11.1
  Top Layer w0.254: D1.1 21.273,8.408 22.377,7.304 U1.2
  Top Layer w0.3: U1.2 22.377,6.764 22.619,6.522 22.619,5.258 23.038,4.839 26.2,4.839 26.607,5.245 26.607,5.894 27.027,6.314 27.027,6.884 U1.11
XIN: IC1.20 Y1.5
pads on no net: AC1.1 AC1.7 AC1.8 AC1.12 AC1.13 AC1.15 AC1.16 AC1.21 AC1.22 AC1.23 AC1.24 IC1.2 IC1.3 IC1.11 IC1.12 IC1.21 IC1.39 IC1.40 IC3.9 IC4.9 IC6.3 J8.2 Q3.2 Q4.2 R23.2 R25.2 S3.2 S3.MP1 S3.MP2 U1. U1.3 U1.9 Y1.2

## Polygon pours and split planes (outlines as drawn)
GND on Layer 1 (split plane): 41.49,0.51 0.51,0.51 0.51,39.49 41.49,39.49
+3V3 on Layer 2 (split plane): 41.49,0.51 0.51,0.51 0.51,39.49 41.49,39.49

## Silkscreen, mask and mechanical layers (free items; w line width, h text height)
Top Overlay:
  lines w0.254: 2,0 2,40 ; 40,0 40,40

## Dimensions
0,40 to 42,40 on Bottom Layer

## Text inside footprints (layer, text, board x,y; h text height)
J8: Mechanical 1 "PH-3" at 4.076,3.409 h1.52 r180